# Altium PCB BreakoutBoard.PcbDoc
Units mil, origin at the board's own origin, x right, y up, seen from the top; angles counter-clockwise.
Board outline 5000 x 6000 mil, 4 copper layers (Top Layer, GND, +24V, Bottom Layer); 8 components, 41 nets, 580 pads, 0 vias.
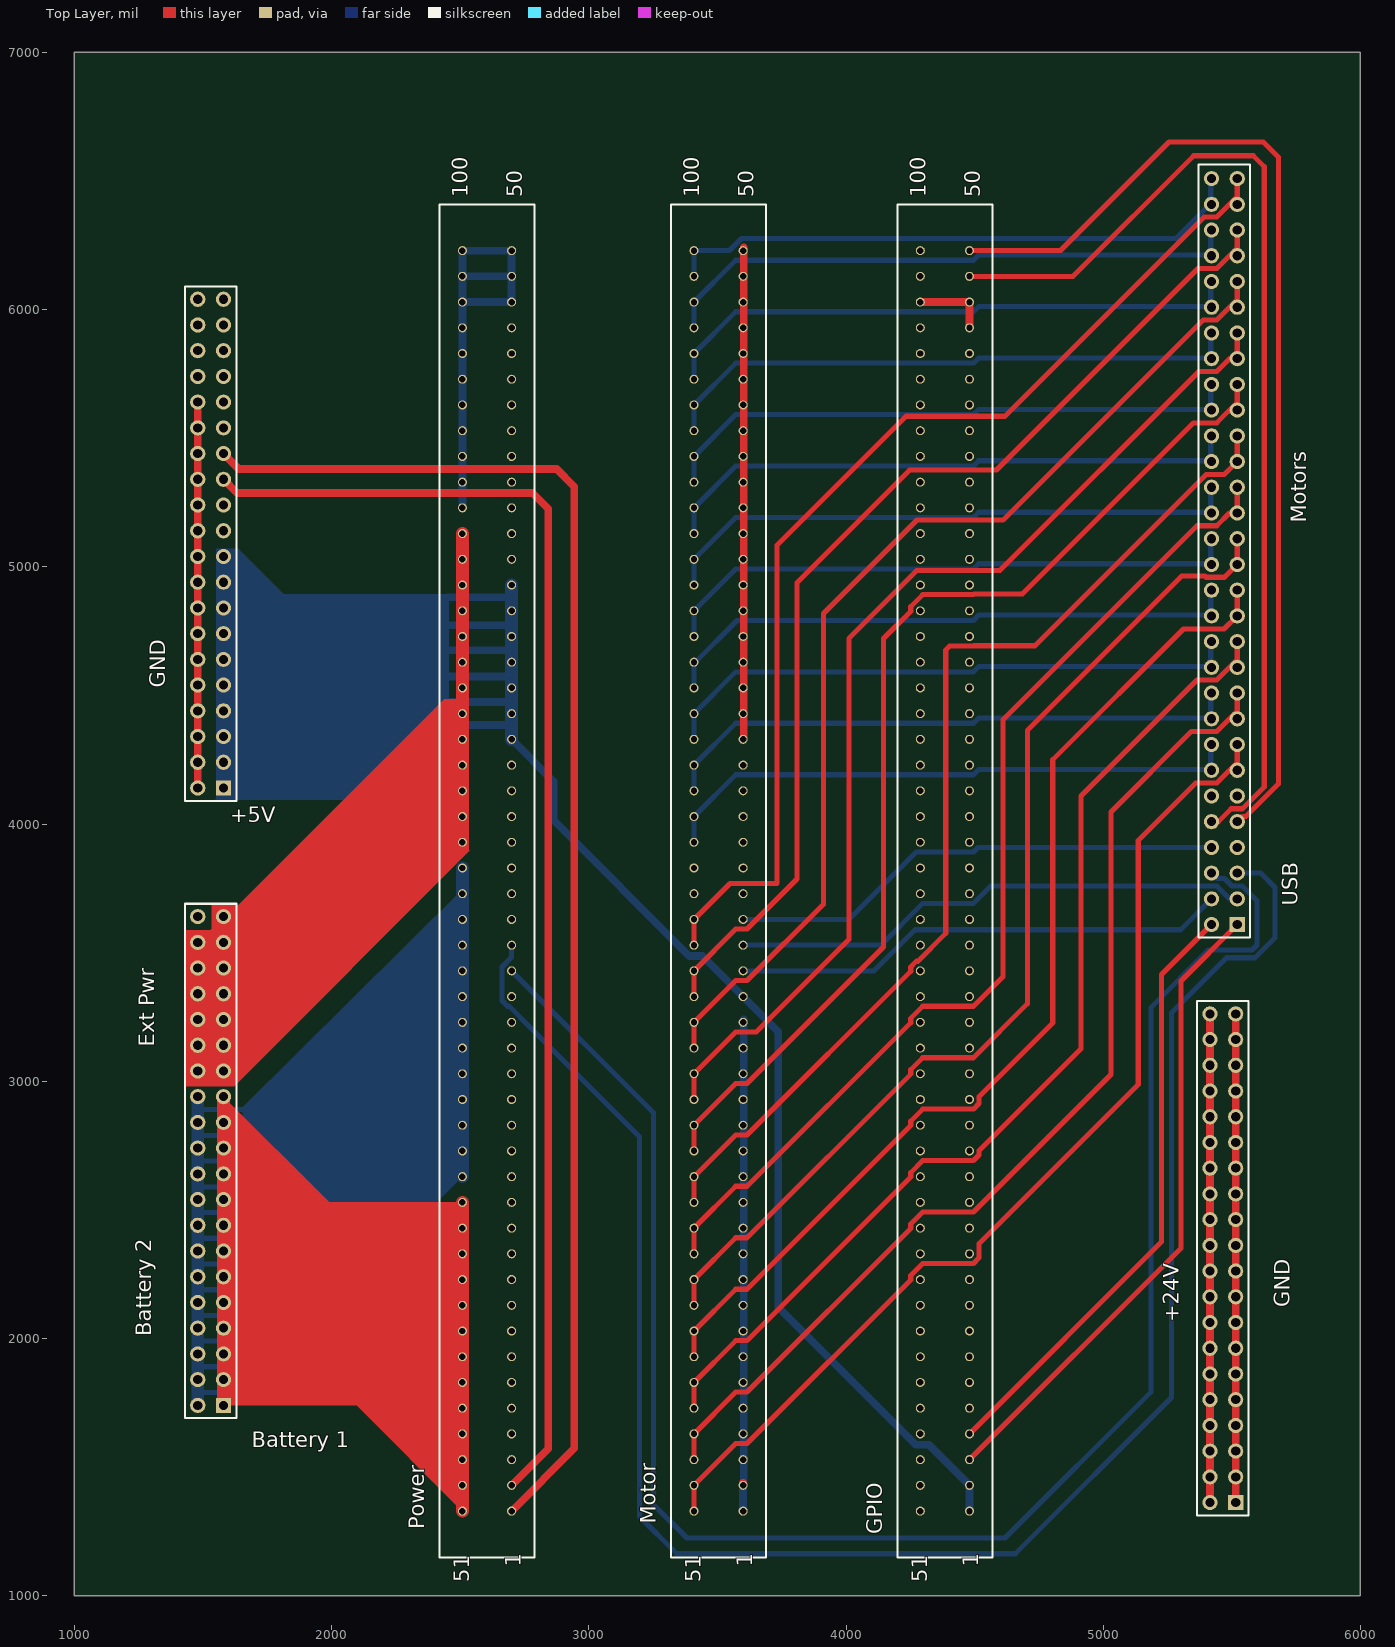
[diagram p0: Top Layer view]
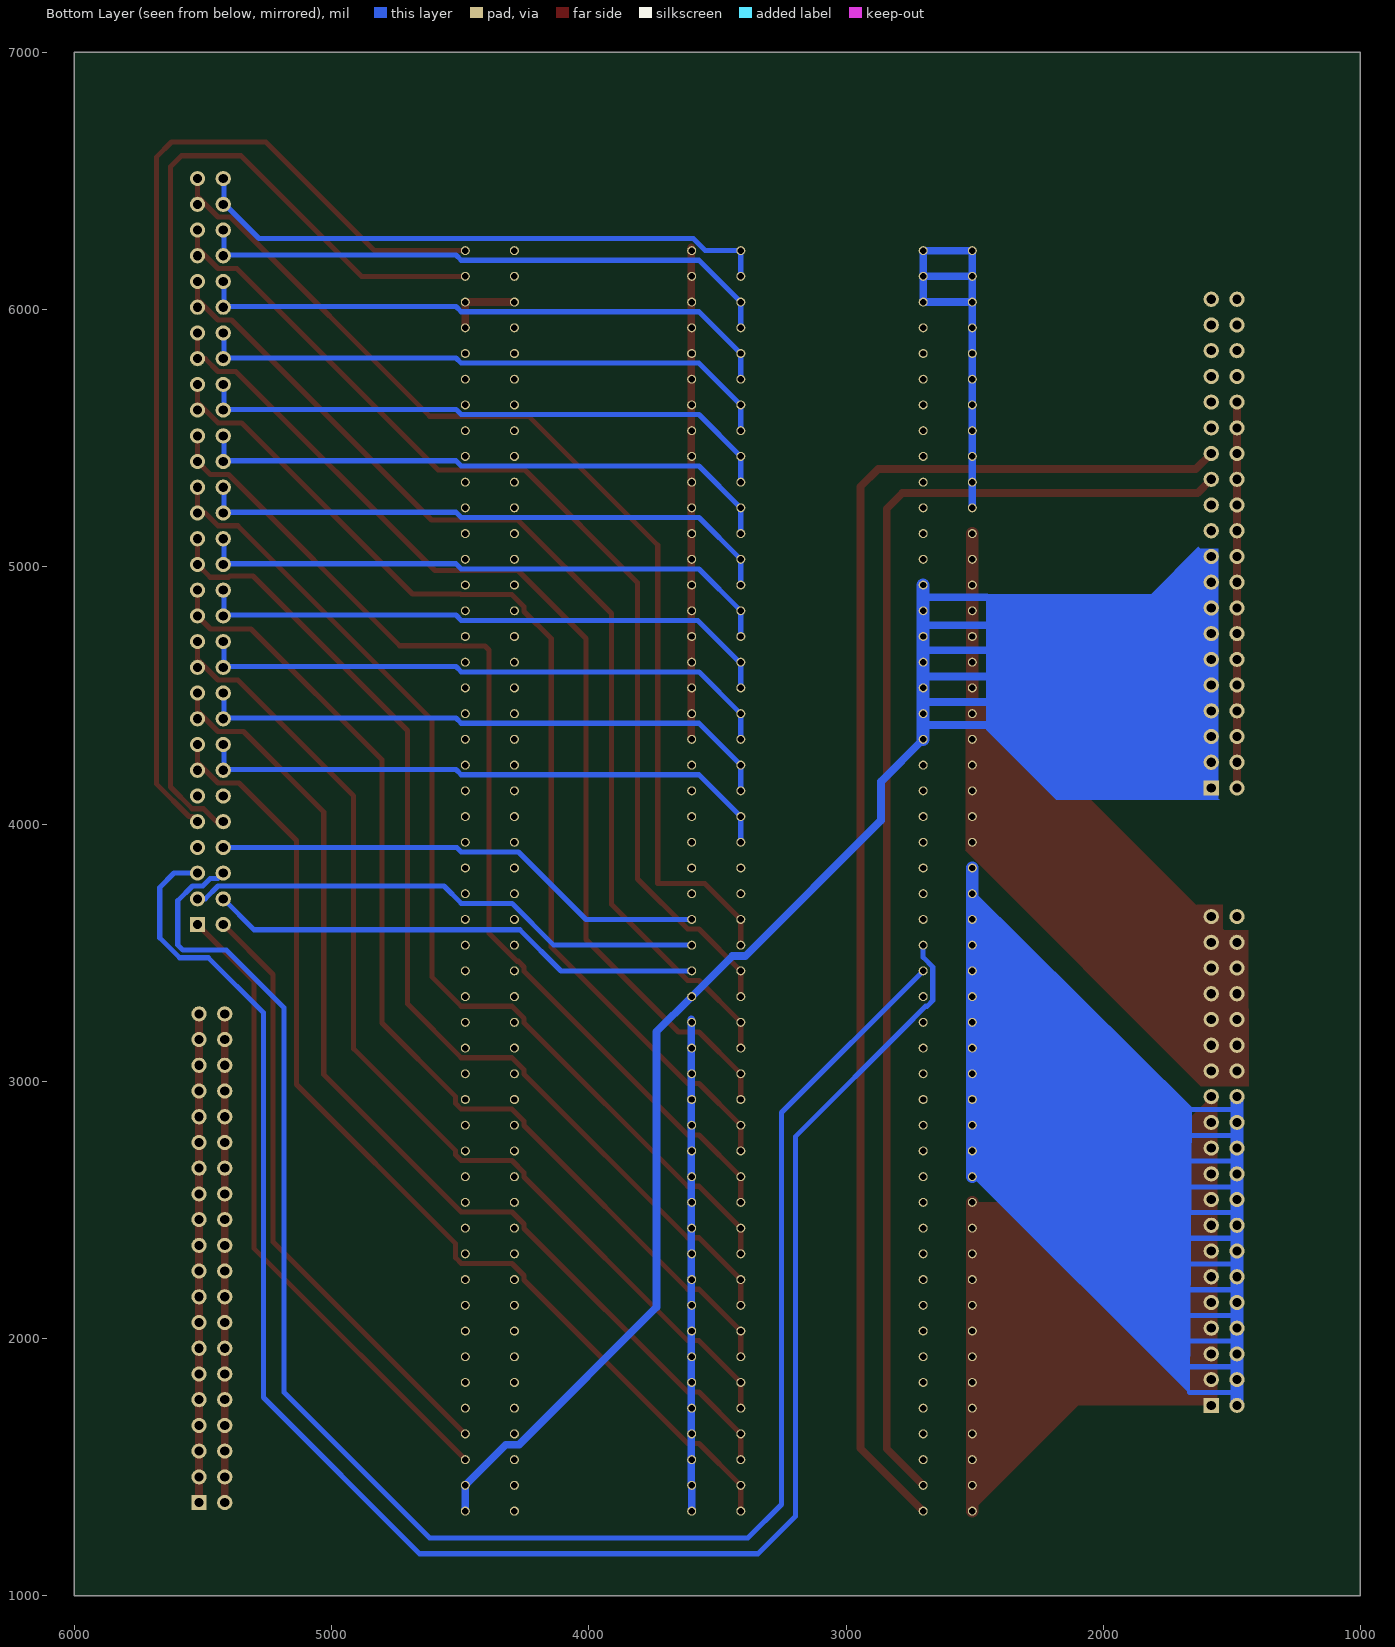
[diagram p1: Bottom Layer view, seen from below]
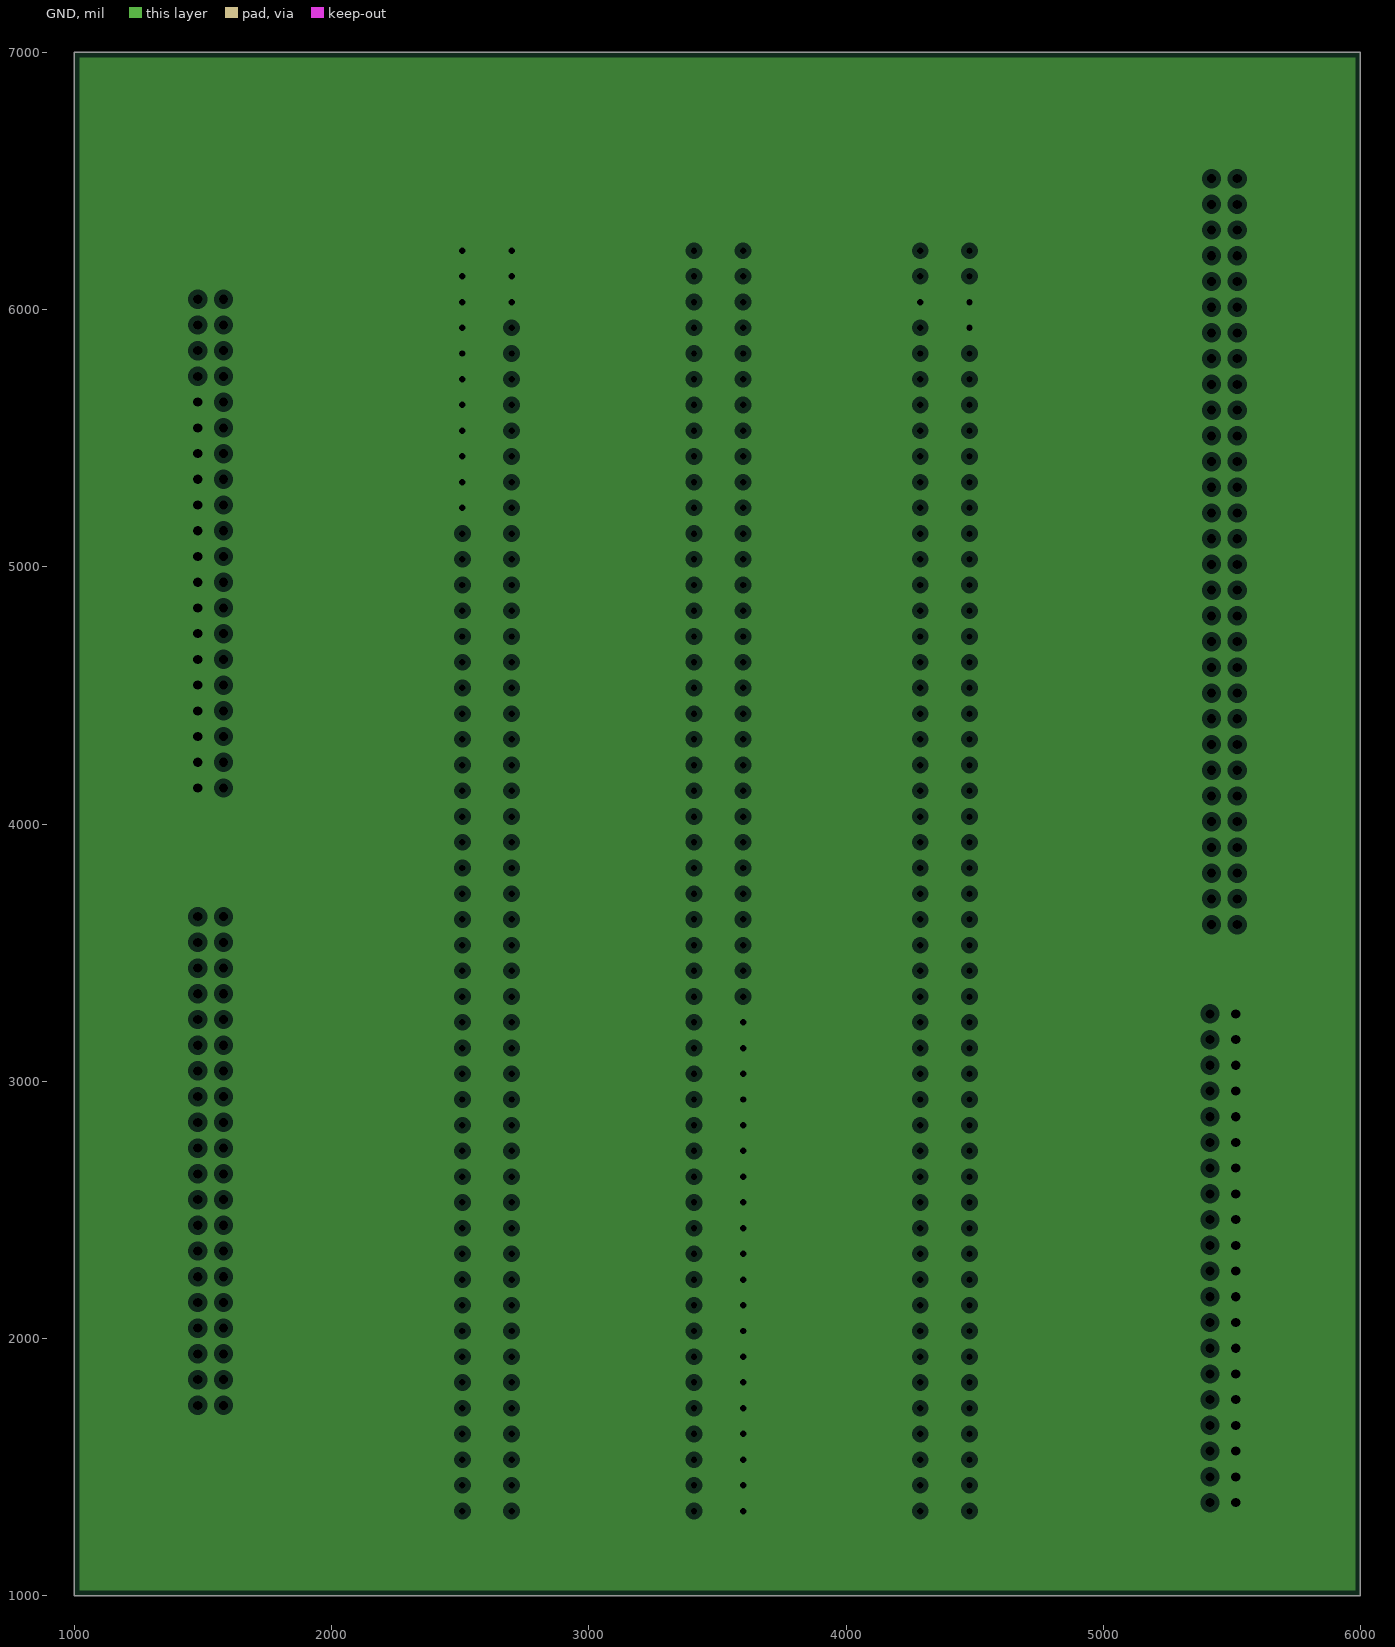
[diagram p2: GND, clearances drawn from the general rule]
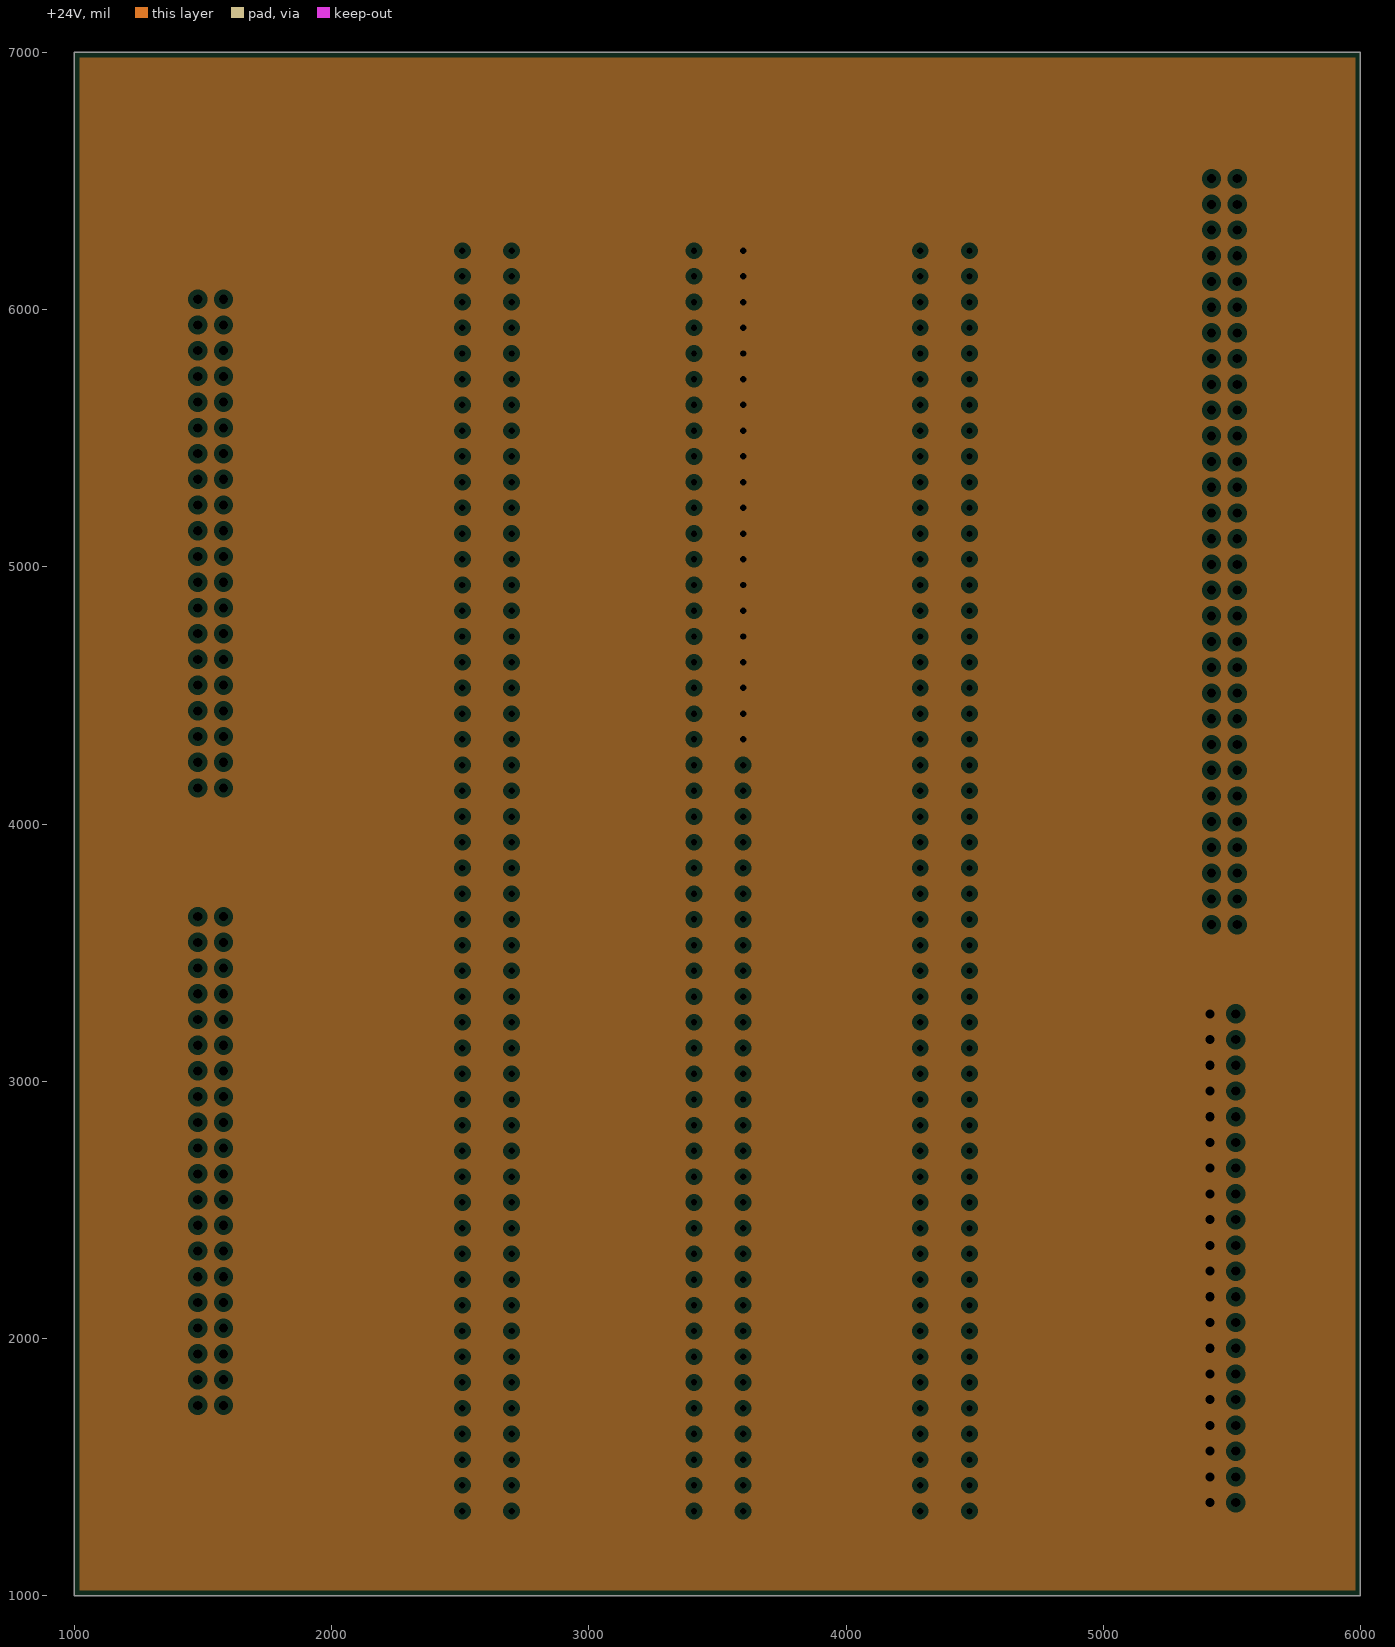
[diagram p3: +24V, clearances drawn from the general rule]

## Layer stack, top to bottom
Top Layer: signal copper 1.4
Dielectric: core 12.6, FR-4, Dk 4.8
GND: plane copper 1.4, net GND
Dielectric: prepreg 12.6, FR-4, Dk 4.8
+24V: plane copper 1.4, net +24V
Dielectric: core 12.6, FR-4, Dk 4.8
Bottom Layer: signal copper 1.4

## Board outline
1000,1000 6000,1000 6000,7000 1000,7000

## Design rules (kind name [scope] priority, off if disabled: settings)
Clearance [All] p1: gap=10
DiffPairsRouting [All] p1: maxlimit=10 minlimit=10 mostfreqgap=10 maxuncoupledlength=500
PlaneClearance [All] p1: clearance=20
PlaneConnect [All] p1: planeconnectstyle=Relief reliefexpansion=20 reliefentries=4 reliefconductorwidth=10 reliefairgap=10
PolygonConnect [All] p1: connectstyle=Relief reliefconductorwidth=10 reliefentries=4 polygonreliefangle="90 Angle"
RoomDefinition BreakoutBoard [InComponentClass('BreakoutBoard')] p1: confinementstyle=ConfineIn formatcopy=TRUE lockcomponents=FALSE outline 7045,1060 7825,1060 7825,2660 7045,2660
RoutingVias [All] p1: holewidth=28 width=50 viastyle="Through Hole" minholewidth=28 minwidth=50 maxholewidth=28 maxwidth=50
SilkscreenOverComponentPads [All] p1: minsilkscreentomaskgap=10
SolderMaskExpansion [All] p1: expansion=4
Width [All] p1: maxlimit=100 minlimit=10 preferedwidth=20
24 further rules are at their usual default settings.

## Classes and differential pairs
component class BreakoutBoard: *
differential pair "USB 1": +"USB DP 1" -"USB DM 1"

## Components (designator, comment, footprint, x,y, rotation, side; value= is the part's Value field where it differs from the comment)
* "5645235-3 R" "5645235-3 R" 7338.94,-5779.94 r90 top
GPIO "Comment" "5645235-3 R" 4480,3779 r90 top
Motor "Comment" "5645235-3 R" 3600,3779 r90 top
Power "Comment" "5645235-3 R" 2700,3779 r90 top
? "Comment" HDR2X20#1 1580,1740 r90 top
? "Comment" HDR2X20#2 5515,1362 r90 top
? "Comment" HDR2X30 5521,3609 r90 top
? "Comment" HDR2X20#1 1580,4140 r90 top

## Footprints (in the part's own frame and the unit in brackets; to place one, negate y for a bottom-side part, rotate by r counter-clockwise, add the part's x,y. Pads: shape width x height; smd on the part's side, far side on the other; paste and mask are expansions set on the pad)
"5645235-3 R" [mil] "Receptor"
  round 35 hole 25 mask+0: 1(-2450,0) 2(-2350,0) 3(-2250,0) 4(-2150,0) 5(-2050,0) 6(-1950,0) 7(-1850,0) 8(-1750,0) 9(-1650,0) 10(-1550,0) 11(-1450,0) 12(-1350,0) 13(-1250,0) 14(-1150,0) 15(-1050,0) 16(-950,0) 17(-850,0) 18(-750,0) 19(-650,0) 20(-550,0) 21(-450,0) 22(-350,0) 23(-250,0) 24(-150,0) 25(-50,0) 26(50,0) 27(150,0) 28(250,0) 29(350,0) 30(450,0) 31(550,0) 32(650,0) 33(750,0) 34(850,0) 35(950,0) 36(1050,0) 37(1150,0) 38(1250,0) 39(1350,0) 40(1450,0) 41(1550,0) 42(1650,0) 43(1750,0) 44(1850,0) 45(1950,0) 46(2050,0) 47(2150,0) 48(2250,0) 49(2350,0) 50(2450,0) 51(-2450,191) 52(-2350,191) 53(-2250,191) 54(-2150,191) 55(-2050,191) 56(-1950,191) 57(-1850,191) 58(-1750,191) 59(-1650,191) 60(-1550,191) 61(-1450,191) 62(-1350,191) 63(-1250,191) 64(-1150,191) 65(-1050,191) 66(-950,191) 67(-850,191) 68(-750,191) 69(-650,191) 70(-550,191) 71(-450,191) 72(-350,191) 73(-250,191) 74(-150,191) 75(-50,191) 76(50,191) 77(150,191) 78(250,191) 79(350,191) 80(450,191) 81(550,191) 82(650,191) 83(750,191) 84(850,191) 85(950,191) 86(1050,191) 87(1150,191) 88(1250,191) 89(1350,191) 90(1450,191) 91(1550,191) 92(1650,191) 93(1750,191) 94(1850,191) 95(1950,191) 96(2050,191) 97(2150,191) 98(2250,191) 99(2350,191) 100(2450,191)
  silkscreen extent -2630,-89 2630,280, body extent -2630,-89 2630,280, height 295
HDR2X20#1 [mm] "Connector; Header; 20x2 Position"
  rect 1.5x1.5 hole 0.9: 1(0,0)
  round 1.5 hole 0.9: 2(0,2.54) 3(2.54,0) 4(2.54,2.54) 5(5.08,0) 6(5.08,2.54) 7(7.62,0) 8(7.62,2.54) 9(10.16,0) 10(10.16,2.54) 11(12.7,0) 12(12.7,2.54) 13(15.24,0) 14(15.24,2.54) 15(17.78,0) 16(17.78,2.54) 17(20.32,0) 18(20.32,2.54) 19(22.86,0) 20(22.86,2.54) 21(25.4,0) 22(25.4,2.54) 23(27.94,0) 24(27.94,2.54) 25(30.48,0) 26(30.48,2.54) 27(33.02,0) 28(33.02,2.54) 29(35.56,0) 30(35.56,2.54) 31(38.1,0) 32(38.1,2.54) 33(40.64,0) 34(40.64,2.54) 35(43.18,0) 36(43.18,2.54) 37(45.72,0) 38(45.72,2.54) 39(48.26,0) 40(48.26,2.54)
  silkscreen extent -1.27,-1.27 49.53,3.81
HDR2X20#2 [mm] "Connector; Header; 20x2 Position"
  rect 1.5x1.5 hole 0.9: 1(0,0)
  round 1.5 hole 0.9: 2(2.54,0) 3(5.08,0) 4(7.62,0) 5(10.16,0) 6(12.7,0) 7(15.24,0) 8(17.78,0) 9(20.32,0) 10(22.86,0) 11(25.4,0) 12(27.94,0) 13(30.48,0) 14(33.02,0) 15(35.56,0) 16(38.1,0) 17(40.64,0) 18(43.18,0) 19(45.72,0) 20(48.26,0) 21(0,2.54) 22(2.54,2.54) 23(5.08,2.54) 24(7.62,2.54) 25(10.16,2.54) 26(12.7,2.54) 27(15.24,2.54) 28(17.78,2.54) 29(20.32,2.54) 30(22.86,2.54) 31(25.4,2.54) 32(27.94,2.54) 33(30.48,2.54) 34(33.02,2.54) 35(35.56,2.54) 36(38.1,2.54) 37(40.64,2.54) 38(43.18,2.54) 39(45.72,2.54) 40(48.26,2.54)
  silkscreen extent -1.27,-1.27 49.53,3.81
HDR2X30 [mm] "Connector; Header; 30x2 Position"
  rect 1.5x1.5 hole 0.9: 1(0,0)
  round 1.5 hole 0.9: 2(0,2.54) 3(2.54,0) 4(2.54,2.54) 5(5.08,0) 6(5.08,2.54) 7(7.62,0) 8(7.62,2.54) 9(10.16,0) 10(10.16,2.54) 11(12.7,0) 12(12.7,2.54) 13(15.24,0) 14(15.24,2.54) 15(17.78,0) 16(17.78,2.54) 17(20.32,0) 18(20.32,2.54) 19(22.86,0) 20(22.86,2.54) 21(25.4,0) 22(25.4,2.54) 23(27.94,0) 24(27.94,2.54) 25(30.48,0) 26(30.48,2.54) 27(33.02,0) 28(33.02,2.54) 29(35.56,0) 30(35.56,2.54) 31(38.1,0) 32(38.1,2.54) 33(40.64,0) 34(40.64,2.54) 35(43.18,0) 36(43.18,2.54) 37(45.72,0) 38(45.72,2.54) 39(48.26,0) 40(48.26,2.54) 41(50.8,0) 42(50.8,2.54) 43(53.34,0) 44(53.34,2.54) 45(55.88,0) 46(55.88,2.54) 47(58.42,0) 48(58.42,2.54) 49(60.96,0) 50(60.96,2.54) 51(63.5,0) 52(63.5,2.54) 53(66.04,0) 54(66.04,2.54) 55(68.58,0) 56(68.58,2.54) 57(71.12,0) 58(71.12,2.54) 59(73.66,0) 60(73.66,2.54)
  silkscreen extent -1.27,-1.27 75.06,3.81

## Nets (pads, with @x,y where several pads share a name; then routed paths per layer and width w, separated by ;. In a path a pad name is that pad's centre, name@x,y a point inside that pad or via, vN(x,y) a via of type N, cw(c..) or ccw(c..) an arc to the next point about the centre after c; other vN are vias at no path point)
+3.3V: ?.25@1580,5340 Power.2 | length 5165
  Top Layer w30: ?.25@1580,5340 1633.5,5286.5 2781.5,5286.5 2842,5226 2842,1571 Power.2
+5V: ?.1@1580,4140 ?.3@1580,4240 ?.5@1580,4340 ?.7@1580,4440 ?.9@1580,4540 ?.11@1580,4640 ?.13@1580,4740 ?.15@1580,4840 ?.17@1580,4940 ?.19@1580,5040 GPIO.1 GPIO.2 Motor.21 Power.31 Power.32 Power.33 Power.34 Power.35 Power.36 Power.37 | length 5899.2
  Bottom Layer w30: 2447,4573 2700,4573 ; 2448,4675 2700,4675 ; 2449,4385 2700,4385 ; 2449,4773 2700,4773 ; 2452,4474 2700,4474 ; 2453,4881 2700,4881 ; Power.31 2864,4165 2864,4013.9 3391.4,3486.5 3442.5,3486.5 Motor.21 3737,3192 3737,2120.9 4271.4,1586.5 4322.5,1586.5 GPIO.2 GPIO.1
  Bottom Layer w50: Power.31 2700,4385 Power.32 2700,4474 Power.33 2700,4573 Power.34 2700,4675 Power.35 2700,4773 Power.36 2700,4881 Power.37
+24V: ?.21@5415,1362 ?.22@5415,1462 ?.23@5415,1562 ?.24@5415,1662 ?.25@5415,1762 ?.26@5415,1862 ?.27@5415,1962 ?.28@5415,2062 ?.29@5415,2162 ?.30@5415,2262 ?.31@5415,2362 ?.32@5415,2462 ?.33@5415,2562 ?.34@5415,2662 ?.35@5415,2762 ?.36@5415,2862 ?.37@5415,2962 ?.38@5415,3062 ?.39@5415,3162 ?.40@5415,3262 Motor.31 Motor.32 Motor.33 Motor.34 Motor.35 Motor.36 Motor.37 Motor.38 Motor.39 Motor.40 Motor.41 Motor.42 Motor.43 Motor.44 Motor.45 Motor.46 Motor.47 Motor.48 Motor.49 Motor.50 | length 3800
  Top Layer w30: Motor.31@3602,4341 3602,4529 3602,4729 3602,5029 3602,5329 3602,5629 3602,6141 Motor.50@3602,6241 ; ?.21@5415,1362 5415,1462 5415,1562 5415,1662 5415,1762 5415,1862 5415,1962 5415,2062 5415,2162 5415,2262 5415,2362 5415,2462 5415,2562 5415,2662 5415,2762 5415,2862 5415,2962 5415,3062 5415,3162 ?.40@5415,3262
+24VReg: ?.27@1580,5440 Power.1 | length 5500.5
  Top Layer w30: ?.27@1580,5440 1640,5380 2875,5380 2944,5311 2944,1573 Power.1
BAT1: ?.1@1580,1740 ?.3@1580,1840 ?.5@1580,1940 ?.7@1580,2040 ?.9@1580,2140 ?.11@1580,2240 ?.13@1580,2340 ?.15@1580,2440 ?.17@1580,2540 ?.19@1580,2640 ?.21@1580,2740 ?.23@1580,2840 ?.25@1580,2940 Power.51 Power.52 Power.53 Power.54 Power.55 Power.56 Power.57 Power.58 Power.59 Power.60 Power.61 Power.62 Power.63 | length 2400
  Top Layer w50: ?.1@1580,1740 1580,1840 1580,1940 1580,2040 1580,2140 1580,2240 1580,2340 1580,2440 1580,2540 1580,2640 1580,2740 1580,2840 ?.25@1580,2940 ; Power.51 Power.52 Power.53 Power.54 Power.55 Power.56 Power.57 Power.58 Power.59 Power.60 Power.61 Power.62 Power.63
BAT2: ?.2@1480,1740 ?.4@1480,1840 ?.6@1480,1940 ?.8@1480,2040 ?.10@1480,2140 ?.12@1480,2240 ?.14@1480,2340 ?.16@1480,2440 ?.18@1480,2540 ?.20@1480,2640 ?.22@1480,2740 ?.24@1480,2840 ?.26@1480,2940 Power.64 Power.65 Power.66 Power.67 Power.68 Power.69 Power.70 Power.71 Power.72 Power.73 Power.74 Power.75 Power.76 | length 4569
  Bottom Layer w20: 1480,1791 1480.53,1790.47 1664.47,1790.47 ; 1480,1890 1663,1890 ; 1480,1987 1482.53,1989.53 1659.53,1989.53 ; 1480,2086 1483.53,2089.53 1661.53,2089.53 ; 1480,2187 1482.53,2189.53 1663.53,2189.53 ; 1480,2287 1482.53,2289.53 1661.53,2289.53 ; 1480,2385 1484.53,2389.53 1660.53,2389.53 ; 1480,2489 1480.53,2489.53 1661.53,2489.53 ; 1480,2587 1482.53,2589.53 1659.53,2589.53 ; 1480,2690 1656,2690 ; 1480,2789 1480.53,2789.53 1654.53,2789.53 ; 1480,2888 1481.53,2889.53 1654.53,2889.53
  Bottom Layer w50: ?.2@1480,1740 1480,1791 1480,1840 1480,1890 1480,1940 1480,1987 1480,2040 1480,2086 1480,2140 1480,2187 1480,2240 1480,2287 1480,2340 1480,2385 1480,2440 1480,2489 1480,2540 1480,2587 1480,2640 1480,2690 1480,2740 1480,2789 1480,2840 1480,2888 ?.26@1480,2940 ; Power.64 Power.65 Power.66 Power.67 Power.68 Power.69 Power.70 Power.71 Power.72 Power.73 Power.74 Power.75 Power.76
ExPre: ?.10@5421,4009 GPIO.49 | length 4004
  Top Layer w20: GPIO.49 4883,6129 5352,6598 5583,6598 5626,6555 5626,4143.96 5541.52,4059.47 5497.47,4059.47 ?.10@5447,4009
"EXT PWR": ?.27@1580,3040 ?.28@1480,3040 ?.29@1580,3140 ?.30@1480,3140 ?.31@1580,3240 ?.32@1480,3240 ?.33@1580,3340 ?.34@1480,3340 ?.35@1580,3440 ?.36@1480,3440 ?.37@1580,3540 ?.38@1480,3540 ?.39@1580,3640 Power.77 Power.78 Power.79 Power.80 Power.81 Power.82 Power.83 Power.84 Power.85 Power.86 Power.87 Power.88 Power.89 | length 1200
  Top Layer w50: Power.77 Power.78 Power.79 Power.80 Power.81 Power.82 Power.83 Power.84 Power.85 Power.86 Power.87 Power.88 Power.89
GND: ?.1@5515,1362 ?.2@1480,4140 ?.2@5515,1462 ?.3@5515,1562 ?.4@1480,4240 ?.4@5515,1662 ?.5@5515,1762 ?.6@1480,4340 ?.6@5515,1862 ?.7@5515,1962 ?.8@1480,4440 ?.8@5515,2062 ?.9@5515,2162 ?.10@1480,4540 ?.10@5515,2262 ?.11@5515,2362 ?.12@1480,4640 ?.12@5515,2462 ?.13@5515,2562 ?.14@1480,4740 ?.14@5515,2662 ?.15@5515,2762 ?.16@1480,4840 ?.16@5515,2862 ?.17@5515,2962 ?.18@1480,4940 ?.18@5515,3062 ?.19@5515,3162 ?.20@1480,5040 ?.20@5515,3262 ?.22@1480,5140 ?.24@1480,5240 ?.26@1480,5340 ?.28@1480,5440 ?.30@1480,5540 ?.32@1480,5640 GPIO.47 GPIO.48 GPIO.98 Motor.1 Motor.2 Motor.3 Motor.4 Motor.5 Motor.6 Motor.7 Motor.8 Motor.9 Motor.10 Motor.11 Motor.12 Motor.13 Motor.14 Motor.15 Motor.16 Motor.17 Motor.18 Motor.19 Motor.20 Power.48 Power.49 Power.50 Power.90 Power.91 Power.92 Power.93 Power.94 Power.95 Power.96 Power.97 Power.98 Power.99 Power.100 | length 7352
  Top Layer w30: ?.2@1480,4140 1480,4240 1480,4340 1480,4440 1480,4540 1480,4640 1480,4740 1480,4840 1480,4940 1480,5040 1480,5140 1480,5240 1480,5340 1480,5440 1480,5540 ?.32@1480,5640 ; Motor.2 Motor.2@3600,1439 ; GPIO.98 GPIO.48 GPIO.47 ; ?.1@5515,1362 5515,1462 5515,1562 5515,1662 5515,1762 5515,1862 5515,1962 5515,2062 5515,2162 5515,2262 5515,2362 5515,2462 5515,2562 5515,2662 5515,2762 5515,2862 5515,2962 5515,3062 5515,3162 ?.20@5515,3262
  Bottom Layer w30: Power.90 Power.91 Power.92 Power.93 Power.94 Power.95 Power.96 Power.97 Power.98 ; Motor.1@3600,1339 Motor.2 ; Motor.2@3602,1441 3602,1829 3602,1929 3602,2329 3602,2529 3602,2829 Motor.18@3602,3029 ; Motor.18@3602,3041 Motor.20@3602,3241 ; Power.98 Power.99 ; Power.98 Power.48 Power.49 ; Power.99 Power.100 Power.50 Power.49 ; Power.99 Power.49
Motor0+: ?.45 ?.47 Motor.67 Motor.68 | length 4148.9
  Top Layer w20: Motor.67 Motor.68 3571.5,3191.5 3651.5,3191.5 4011,3551 4011,4721 4275,4985 4597.94,4985 5372.42,5759.47 5441.52,5759.47 5491.04,5809 ?.45 ?.47
Motor0-: ?.37@5521,5409 ?.39@5521,5509 Motor.63 Motor.64 | length 4118.9
  Top Layer w20: Motor.63 Motor.64 3571.5,2791.5 3615.53,2791.5 4251.5,3427.47 4251.5,3444.53 4273.47,3466.5 4279.53,3466.5 4388,3574.97 4388,4676 4403.5,4691.5 4495.53,4691.5 4497.03,4693 4734.96,4693 5400.48,5358.53 5441.52,5358.53 5442.04,5358 5470,5358 5521,5409 ?.39@5521,5509
Motor1+: ?.14@5421,4209 ?.16@5421,4309 Motor.77 Motor.78 | length 2284.8
  Bottom Layer w20: Motor.77 Motor.78 3571.5,4191.5 4495.53,4191.5 4516.03,4212 5418,4212 ?.16@5418,4312
Motor1-: ?.57 ?.59 Motor.73 Motor.74 | length 4216.3
  Top Layer w20: Motor.73 Motor.74 3549,3769 3732,3769 3732,5084 4233,5585 4618,5585 5392.47,6359.47 5441.52,6359.47 5521,6438.96 ?.59
Motor2+: ?.34@5421,5209 ?.36@5421,5309 Motor.87 Motor.88 | length 2284.8
  Bottom Layer w20: Motor.87 Motor.88 3571.5,5191.5 4495.53,5191.5 4516.03,5212 5418,5212 ?.36@5418,5312
Motor2-: ?.22@5421,4609 ?.24@5421,4709 Motor.81 Motor.82 | length 2284.8
  Bottom Layer w20: Motor.81 Motor.82 3571.5,4591.5 4495.53,4591.5 4516.03,4612 5418,4612 ?.24@5418,4712
Motor3+: ?.49 ?.51 Motor.69 Motor.70 | length 4107.9
  Top Layer w20: Motor.69 Motor.70 3571.5,3391.5 3615.53,3391.5 3912,3687.97 3912,4818 4276,5182 4611,5182 5388.47,5959.47 5441.52,5959.47 5521,6038.96 ?.51
Motor3-: ?.41 ?.43 Motor.65 Motor.66 | length 4158.9
  Top Layer w20: Motor.65 Motor.66 3571.5,2991.5 3615.53,2991.5 4146,3521.97 4146,4721 4251.5,4826.5 4251.5,4844.53 4298.47,4891.5 4495.53,4891.5 4498.03,4894 4685,4894 5350.47,5559.47 5441.52,5559.47 5521,5638.96 ?.43
Motor4+: ?.18@5421,4409 ?.20@5421,4509 Motor.79 Motor.80 | length 2284.8
  Bottom Layer w20: Motor.79 Motor.80 3571.5,4391.5 4495.53,4391.5 4516.03,4412 5418,4412 ?.20@5418,4512
Motor4-: ?.53 ?.55 Motor.71 Motor.72 | length 4120.8
  Top Layer w20: Motor.71 Motor.72 3571.5,3591.5 3615.53,3591.5 3810,3785.97 3810,4938 4248,5376 4585,5376 5368.47,6159.47 5441.52,6159.47 5521,6238.96 ?.55
Motor5+: ?.30@5421,5009 ?.32@5421,5109 Motor.85 Motor.86 | length 2284.8
  Bottom Layer w20: Motor.85 Motor.86 3571.5,4991.5 4495.53,4991.5 4516.03,5012 5418,5012 ?.32@5418,5112
Motor5-: ?.26@5421,4809 ?.28@5421,4909 Motor.83 Motor.84 | length 2284.8
  Bottom Layer w20: Motor.83 Motor.84 3414,4629 3576.5,4791.5 4495.53,4791.5 4516.03,4812 5418,4812 ?.28@5418,4912
Motor6+: ?.29@5521,5009 ?.31@5521,5109 Motor.59 Motor.60 | length 4100
  Top Layer w20: Motor.59 Motor.60 3571.5,2391.5 3615.53,2391.5 4251.5,3027.47 4251.5,3044.53 4298.47,3091.5 4495.53,3091.5 4705,3300.97 4705,4364 5305,4964 5395.96,4964 5400.48,4959.47 5471.47,4959.47 5521,5009 ?.31@5521,5109
Motor6-: ?.33@5521,5209 ?.35@5521,5309 Motor.61 Motor.62 | length 4058.7
  Top Layer w20: Motor.61 Motor.62 3571.5,2591.5 3615.53,2591.5 4251.5,3227.47 4251.5,3244.53 4298.47,3291.5 4495.53,3291.5 4610,3405.97 4610,4405 5364.47,5159.47 5441.52,5159.47 5491.04,5209 5521,5209 ?.35@5521,5309
Motor7+: ?.46 ?.48 Motor.93 Motor.94 | length 2284.8
  Bottom Layer w20: Motor.93 Motor.94 3571.5,5791.5 4495.53,5791.5 4516.03,5812 5418,5812 ?.48@5418,5912
Motor7-: ?.25@5521,4809 ?.27@5521,4909 Motor.57 Motor.58 | length 4089
  Top Layer w20: Motor.57 Motor.58 3571.5,2191.5 3615.53,2191.5 4251.5,2827.47 4251.5,2844.53 4298.47,2891.5 4495.53,2891.5 4517.5,2913.47 4517.5,2939.5 4804,3226 4804,4250 5312.53,4758.53 5441.52,4758.53 5442.04,4758 5470,4758 5521,4809 ?.27@5521,4909
Motor8+: ?.38@5421,5409 ?.40@5421,5509 Motor.89 Motor.90 | length 2284.8
  Bottom Layer w20: Motor.89 Motor.90 3571.5,5391.5 4495.53,5391.5 4516.03,5412 5418,5412 ?.40@5418,5512
Motor8-: ?.42 ?.44 Motor.91 Motor.92 | length 2284.8
  Bottom Layer w20: Motor.91 Motor.92 3571.5,5591.5 4495.53,5591.5 4516.03,5612 5418,5612 ?.44@5418,5712
Motor9+: ?.17@5521,4409 ?.19@5521,4509 Motor.53 Motor.54 | length 4054.1
  Top Layer w20: Motor.53 Motor.54 3571.5,1791.5 3615.53,1791.5 4251.5,2427.47 4251.5,2444.53 4298.47,2491.5 4495.53,2491.5 5030,3025.97 5030,4047 5342.47,4359.47 5441.52,4359.47 5521,4438.96 ?.19@5521,4509
Motor9-: ?.21@5521,4609 ?.23@5521,4709 Motor.55 Motor.56 | length 4041.2
  Top Layer w20: Motor.55 Motor.56 3571.5,1991.5 3615.53,1991.5 4251.5,2627.47 4251.5,2644.53 4298.47,2691.5 4495.53,2691.5 4517.5,2713.47 4517.5,2729.5 4914,3126 4914,4109 5364.47,4559.47 5441.52,4559.47 5521,4638.96 ?.23@5521,4709
Motor10+: ?.58 ?.60 Motor.99 Motor.100 | length 2284.8
  Bottom Layer w20: Motor.99 Motor.100 3546.97,6229 3593.97,6276 5282,6276 5418,6412 ?.60@5418,6512
Motor10-: ?.13@5521,4209 ?.15@5521,4309 Motor.51 Motor.52 | length 4044.1
  Top Layer w20: Motor.51 Motor.52 3571.5,1591.5 3615.53,1591.5 4251.5,2227.47 4251.5,2244.53 4298.47,2291.5 4495.53,2291.5 4517.5,2313.47 4517.5,2368.5 5136,2987 5136,3936 5359.47,4159.47 5441.52,4159.47 5521,4238.96 ?.15@5521,4309
Motor11+: ?.50 ?.52 Motor.95 Motor.96 | length 2284.8
  Bottom Layer w20: Motor.95 Motor.96 3571.5,5991.5 4495.53,5991.5 4516.03,6012 5418,6012 ?.52@5418,6112
Motor11-: ?.54 ?.56 Motor.97 Motor.98 | length 2284.8
  Bottom Layer w20: Motor.97 Motor.98 3571.5,6191.5 4495.53,6191.5 4516.03,6212 5418,6212 ?.56@5418,6312
TEMP: ?.9@5521,4009 GPIO.50 | length 4056.8
  Top Layer w20: GPIO.50 4834,6229 5256,6651 5622,6651 5681,6592 5681,4156.53 5553.94,4029.47 5541.47,4029.47 ?.9@5521,4009
"USB 5V": ?.8@5421,3909 Motor.24 | length 1938.4
  Bottom Layer w20: Motor.24 4011,3629 4273.5,3891.5 4495.53,3891.5 4513.03,3909 ?.8@5421,3909
  Bottom Layer w30: Motor.24 Motor.24@3601,3630
"USB DM 1": ?.2@5421,3609 GPIO.4 | length 2369.8
  Top Layer w20: GPIO.4 5227,2376 5227,3415 ?.2@5421,3609
"USB DM 2": ?.4@5421,3709 Motor.22 | length 1937
  Bottom Layer w20: Motor.22 4108,3429 4268,3589 5301,3589 ?.4@5421,3709
"USB DM 3": ?.6@5421,3809 Power.22 | length 6898.8
  Bottom Layer w20: Power.22 3251,2878 3251,1355 3382,1224 4618,1224 5185,1791 5185,3286 5409,3510 5578,3510 5598,3530 5598,3702.04 5540.57,3759.47 5500.48,3759.47 5471.43,3788.53 ?.6@5441.47,3788.53
"USB DP 1": ?.1@5521,3609 GPIO.3 | length 2511.2
  Top Layer w20: GPIO.3 5302,2351 5302,3390 ?.1@5521,3609
"USB DP 2": ?.3@5521,3709 Motor.23 | length 2036.6
  Bottom Layer w20: Motor.23 4135.97,3529 4298.47,3691.5 4495.53,3691.5 4562.56,3758.53 5441.52,3758.53 5491.04,3709 ?.3@5521,3709
"USB DP 3": ?.5@5521,3809 Power.23 | length 7226.4
  Bottom Layer w20: Power.23 2700,3482.03 2662.5,3444.53 2662.5,3313.47 2684.47,3291.5 2690.53,3291.5 2737.5,3244.53 2737.5,3243.5 3197,2784 3197,1308 3342,1163 4658,1163 5265,1770 5265,3266 5479,3480 5590.43,3480 5668,3557.57 5668,3753 5612,3809 ?.5@5521,3809
pads on no net: *.1 *.2 *.3 *.4 *.5 *.6 *.7 *.8 *.9 *.10 *.11 *.12 *.13 *.14 *.15 *.16 *.17 *.18 *.19 *.20 *.21 *.22 *.23 *.24 *.25 *.26 *.27 *.28 *.29 *.30 *.31 *.32 *.33 *.34 *.35 *.36 *.37 *.38 *.39 *.40 *.41 *.42 *.43 *.44 *.45 *.46 *.47 *.48 *.49 *.50 *.51 *.52 *.53 *.54 *.55 *.56 *.57 *.58 *.59 *.60 *.61 *.62 *.63 *.64 *.65 *.66 *.67 *.68 *.69 *.70 *.71 *.72 *.73 *.74 *.75 *.76 *.77 *.78 *.79 *.80 *.81 *.82 *.83 *.84 *.85 *.86 *.87 *.88 *.89 *.90 *.91 *.92 *.93 *.94 *.95 *.96 *.97 *.98 *.99 *.100 ?.7@5521,3909 ?.11@5521,4109 ?.12@5421,4109 ?.21@1580,5140 ?.23@1580,5240 ?.29@1580,5540 ?.31@1580,5640 ?.33@1580,5740 ?.34@1480,5740 ?.35@1580,5840 ?.36@1480,5840 ?.37@1580,5940 ?.38@1480,5940 ?.39@1580,6040 ?.40@1480,3640 ?.40@1480,6040 GPIO.5 GPIO.6 GPIO.7 GPIO.8 GPIO.9 GPIO.10 GPIO.11 GPIO.12 GPIO.13 GPIO.14 GPIO.15 GPIO.16 GPIO.17 GPIO.18 GPIO.19 GPIO.20 GPIO.21 GPIO.22 GPIO.23 GPIO.24 GPIO.25 GPIO.26 GPIO.27 GPIO.28 GPIO.29 GPIO.30 GPIO.31 GPIO.32 GPIO.33 GPIO.34 GPIO.35 GPIO.36 GPIO.37 GPIO.38 GPIO.39 GPIO.40 GPIO.41 GPIO.42 GPIO.43 GPIO.44 GPIO.45 GPIO.46 GPIO.51 GPIO.52 GPIO.53 GPIO.54 GPIO.55 GPIO.56 GPIO.57 GPIO.58 GPIO.59 GPIO.60 GPIO.61 GPIO.62 GPIO.63 GPIO.64 GPIO.65 GPIO.66 GPIO.67 GPIO.68 GPIO.69 GPIO.70 GPIO.71 GPIO.72 GPIO.73 GPIO.74 GPIO.75 GPIO.76 GPIO.77 GPIO.78 GPIO.79 GPIO.80 GPIO.81 GPIO.82 GPIO.83 GPIO.84 GPIO.85 GPIO.86 GPIO.87 GPIO.88 GPIO.89 GPIO.90 GPIO.91 GPIO.92 GPIO.93 GPIO.94 GPIO.95 GPIO.96 GPIO.97 GPIO.99 GPIO.100 Motor.25 Motor.26 Motor.27 Motor.28 Motor.29 Motor.30 Motor.75 Motor.76 Power.3 Power.4 Power.5 Power.6 Power.7 Power.8 Power.9 Power.10 Power.11 Power.12 Power.13 Power.14 Power.15 Power.16 Power.17 Power.18 Power.19 Power.20 Power.21 Power.24 Power.25 Power.26 Power.27 Power.28 Power.29 Power.30 Power.38 Power.39 Power.40 Power.41 Power.42 Power.43 Power.44 Power.45 Power.46 Power.47
copper on no net: | length 73
  Top Layer w20: 2191,0 2264,0

## Polygon pours and split planes (outlines as drawn)
GND on GND (split plane): 5979.9,1020.1 1020.1,1020.1 1020.1,6979.9 5979.9,6979.9
+24V on +24V (split plane): 5979.9,1020.1 1020.1,1020.1 1020.1,6979.9 5979.9,6979.9

## Other copper
Top Layer:
  region net BAT1: 2509,1329 2098,1740 1580,1740 1580,2940 1991,2529 2509,2529
  region net "EXT PWR": 1436,3587 1529,3587 1535,3593 1535,3686 1636,3686 1638,3684 2439,4485 2534,4485 2534,3900 2537,3897 1621,2981 1434,2981
Bottom Layer:
  region net BAT2: 1655,2898 2509,3744 2509,2629 1670.47,1790.47 1664.47,1790.47
  region net +5V: 2455,4893 1814,4893 1630,5077 1623,5070 1552,5070 1552,4099 1548,4095 2183,4095 2455,4367

## Silkscreen, mask and mechanical layers (free items; w line width, h text height)
Top Overlay:
  text "Motors" at 5789,5172 h60 r90
  text "GND" at 1354,4530 h60 r90
  text "+5V" at 1606,4006 h60
  text "USB" at 5757,3683 h60 r90
  text "Ext Pwr" at 1311,3134 h60 r90
  text "GND" at 5725,2122 h60 r90
  text "+24V" at 5294,2064 h60 r90
  text "Battery 2" at 1299,2009 h60 r90
  text "Battery 1" at 1689,1577 h60

## Text inside footprints (layer, text, board x,y; h text height)
*: Top Overlay "1" at 7373.94,-8446 h60 r90; Top Overlay "51" at 7173.94,-8505.98 h60 r90; Top Overlay "50" at 7379.94,-3122.94 h60 r90; Top Overlay "100" at 7168.94,-3122.94 h60 r90
GPIO: Top Overlay "100" at 4310,6436 h60 r90; Top Overlay "50" at 4521,6436 h60 r90; Top Overlay "51" at 4315,1052.96 h60 r90; Top Overlay "1" at 4515,1112.94 h60 r90
Motor: Top Overlay "100" at 3430,6436 h60 r90; Top Overlay "50" at 3641,6436 h60 r90; Top Overlay "51" at 3435,1052.96 h60 r90; Top Overlay "1" at 3635,1112.94 h60 r90
Power: Top Overlay "100" at 2530,6436 h60 r90; Top Overlay "50" at 2741,6436 h60 r90; Top Overlay "51" at 2535,1052.96 h60 r90; Top Overlay "1" at 2735,1112.94 h60 r90